# EAGLE board RFM2Pi_v2.6 (EAGLE 6.4)
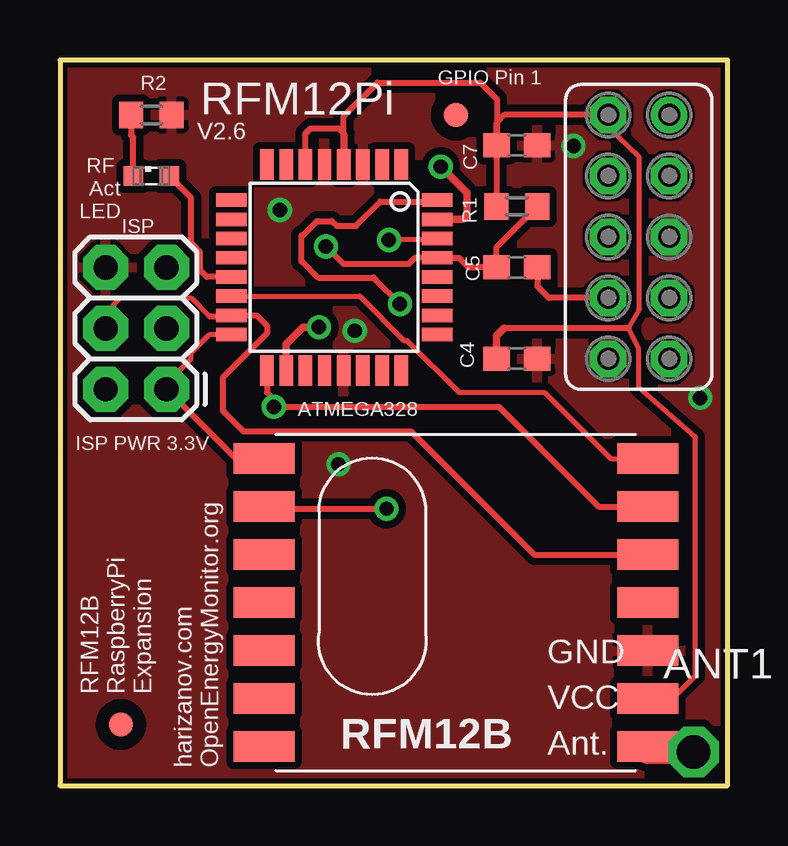
[diagram p0: board, top side]
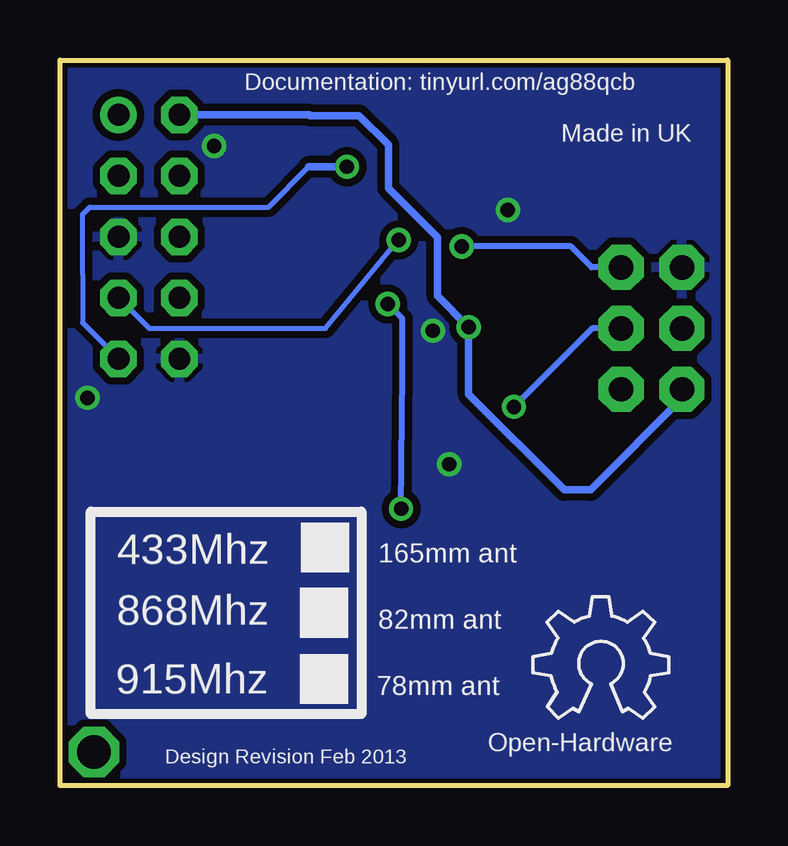
[diagram p1: board, bottom side, seen from below]

Size 27.84 x 30.23 mm. Coordinates in mm from the lower left corner, seen from the top.
Outline: 0,30.23 0,0 27.84,0 27.84,30.23 0,30.23
Copper layers (1*16): Top 0.035mm / dielectric 1.5mm / Bottom 0.035mm
Design rules "default *": minimum track width 8mil, minimum drill 0.6mm, track to track 8mil, track to pad 8mil, pad to pad 8mil, via to via 8mil, smd to smd 5mil, copper to edge 8mil, drill to drill 8mil, minimum pad ring 12mil, minimum via ring 8mil, stop-mask expansion 4mil, vias tented up to drill 0.6mm, thermal gap 8mil
Net classes: 0 default: width 0.254 mm, drill 0.254 mm, clearance 0.254 mm; 1 power: width 0.305 mm, drill 0.305 mm, clearance 0.305 mm

## Footprints (pad centres in the part's own frame; a part is rotated, then mirrored left to right if it is on the bottom)
PAD-01 = drill 1.4 pad 1.778 octagon: 1 0,0
C0603 = smd 1.1 x 1: 1 -0.85,0; 2 0.85,0
2X3 = drill 1.016 pad 1.88 octagon: 1 0,0; 2 0,2.54; 3 2.54,0; 4 2.54,2.54; 5 5.08,0; 6 5.08,2.54
SML0603 = smd 0.8 x 0.8: A 0.75,0; C -0.75,0
R0603 = smd 1 x 1.1: 1 -0.85,0; 2 0.85,0
FE05-2 = drill 0.914: 1 -5.08,1.27 | drill 0.914 octagon: 2 -5.08,-1.27; 3 -2.54,1.27; 4 -2.54,-1.27; 5 0,1.27; 6 0,-1.27; 7 2.54,1.27; 8 2.54,-1.27; 9 5.08,1.27; 10 5.08,-1.27
RFM12B = smd 2.54 x 1.27: ANT 8,-6; FFS -8,2; GND 8,-2; IRQ -8,4; P$8 -8,0; P$9 -8,-2; P$10 -8,-4; P$12 -8,-6; P$16 8,0; SCK 8,4; SDI 8,2; SDO -8,6; SEL 8,6; VDD 8,-4
TQFP32-08 = smd 1.27 x 0.559: 1 -4.293,2.8; 2 -4.293,2; 3 -4.293,1.2; 4 -4.293,0.4; 5 -4.293,-0.4; 6 -4.293,-1.2; 7 -4.293,-2; 8 -4.293,-2.8; 17 4.293,-2.8; 18 4.293,-2; 19 4.293,-1.2; 20 4.293,-0.4; 21 4.293,0.4; 22 4.293,1.2; 23 4.293,2; 24 4.293,2.8 | smd 0.559 x 1.27: 9 -2.8,-4.293; 10 -2,-4.293; 11 -1.2,-4.293; 12 -0.4,-4.293; 13 0.4,-4.293; 14 1.2,-4.293; 15 2,-4.293; 16 2.8,-4.293; 25 2.8,4.293; 26 2,4.293; 27 1.2,4.293; 28 0.4,4.293; 29 -0.4,4.293; 30 -1.2,4.293; 31 -2,4.293; 32 -2.8,4.293
FIDUCIAL_1MM = smd 1 x 1: 1 0,0

## Placement (x,y rotation side)
ANT1  [PAD-01]  26.42,1.4 0 top
C4  0.1uF  [C0603]  19.05,17.78 0 top
C5  0.1uF  [C0603]  19.05,21.59 180 top
C7  0.1uF  [C0603]  19.05,26.67 0 top
ISP  AVR_SPI_PRG_6PTH  [2X3]  4.45,16.51 90 top
LED  [SML0603]  3.81,25.4 0 top
R1  10K  [R0603]  19.05,24.13 180 top
R2  220R  [R0603]  3.81,27.94 180 top
RASPBERRY_PI  [FE05-2]  24.13,22.86 270 top
RFM12B  RFM12B  [RFM12B]  16.51,7.62 0 top
U2  ATMEGA168  [TQFP32-08]  11.43,21.59 270 top
U$1  FIDUCIAL  [FIDUCIAL_1MM]  16.51,27.94 0 top
U$2  FIDUCIAL  [FIDUCIAL_1MM]  2.54,2.54 0 top
U$4  [OSHW_6X200_NOTEXT]  8.13,2.79 0 bottom

## Library data of the parts
ANT1 = discrete
C4 C5 = rcl
C7 = resistor
ISP U2 = SparkFun
LED = led
R1 R2 U$1 U$2 = adafruit
RASPBERRY_PI = con-lsta; OC_FARNELL: unknown; OC_NEWARK: unknown
RFM12B = JeeLabs
U$4 = OSHW

## Nets
+3V3 [power]: C4.1 C7.1 ISP.2 R1.2 RASPBERRY_PI.2 RFM12B.VDD U2.4 U2.6 U2.18
_RESET: C5.1 RASPBERRY_PI.8
A0: U2.23
A1: U2.24
A2: U2.25
A3: U2.26
A4/SDA: U2.27
A5/SCL: U2.28
A6: U2.19
A7: U2.22
D0/RX: RASPBERRY_PI.7 U2.30
D1/TX: RASPBERRY_PI.9 U2.31
D2: RFM12B.IRQ U2.32
D3: U2.1
D4: U2.2
D5: U2.9
D6: U2.10
D7: U2.11
D8: U2.12
D9: LED.A U2.13
D10: RFM12B.SEL U2.14
D11/MOSI: ISP.4 RFM12B.SDI U2.15
D12/MISO: ISP.1 RFM12B.SDO U2.16
D13/SCK: ISP.3 RFM12B.SCK U2.17
GND [power]: C4.2 C7.2 ISP.6 R2.1 RASPBERRY_PI.5 RASPBERRY_PI.10 RFM12B.GND U2.3 U2.5 U2.21
N$3: LED.C R2.2
N$6 [power]: ANT1.1 RFM12B.ANT
RESET: C5.2 ISP.5 R1.1 U2.29

## Tracks (layer width: path | path; a pad name or v marks a point on that pad's centre or on a via)
+3V3  (via drill 0.6 pad 1.01)
  Top 0.203: RASPBERRY_PI.2 22.86,27.43 24.13,26.21 24.13,19.8 23.71,19.05 24.13,18.19 24.13,16.57 26.49,14.51 26.49,4.57 25.54,3.62 RFM12B.VDD
  Top 0.254: 23.71,19.05 18.51,19.05 | RASPBERRY_PI.2 18.54,27.94 18.2,27.6 C7.1 | C7.1 R1.2 | U2.6 10.23,27.17 10.44,27.38 11.61,27.38 11.86,27.13 11.86,25.91 U2.4 11.83,27.88 13.23,29.29 17.53,29.29 18.21,28.6 18.21,26.68 C7.1
  Top 0.305: 18.51,19.05 18.2,18.74 C4.1 | U2.18 9.43,18.39 10.14,19.1 v10.8,19.1
  Bottom 0.254: 17.41,27.91 17.43,27.94 | ISP.2 1.9,16.13
  Bottom 0.305: 17.43,27.94 RASPBERRY_PI.2 | 17.41,27.91 15.37,27.91 14.15,26.7 14.15,24.89 12.1,22.84 12.1,20.4 v10.8,19.1 10.8,16.3 6.81,12.32 5.71,12.32 1.9,16.13
_RESET
  Top 0.254: C5.1 19.9,20.81 20.39,20.32 RASPBERRY_PI.8
D0/RX  (via drill 0.6)
  Top 0.203: U2.30 15.67,22.73 v13.72,22.73
  Bottom 0.203: RASPBERRY_PI.7 24.13,19.05 16.76,19.05 v13.72,22.73
D1/TX  (via drill 0.6)
  Top 0.305: U2.31 16.81,23.59 16.97,23.75 16.97,24.69 v15.88,25.78
  Bottom 0.203: RASPBERRY_PI.9 26.9,19.28 26.9,21.31 26.9,23.8 26.59,24.11 19.15,24.11 17.48,25.78
  Bottom 0.305: v15.88,25.78 17.48,25.78
D2  (via drill 0.6)
  Top 0.254: v14.17,20.07 13.16,21.08 13.08,21.16 10.77,21.16 10.08,21.84 10.06,21.84 10.06,22.91 10.11,22.91 10.72,23.52 11.33,23.52 11.53,23.32 12.34,23.32 13.36,24.33 15.6,24.33 U2.32 | v13.61,11.53 7.87,11.53 8.48,11.53 RFM12B.IRQ
  Bottom 0.254: v14.17,20.07 13.56,19.46 13.56,17.22 v13.61,11.53
D9
  Top 0.254: U2.13 6.12,21.19 5.84,21.46 5.84,22.23 5.46,22.61 5.46,24.5 LED.A
D10
  Top 0.203: U2.14 12.5,20.39 14.35,18.54 14.48,18.54 16.64,16.38 20.2,16.38 22.96,13.62 RFM12B.SEL
D11/MOSI
  Top 0.203: 1.9,19.68 2.54,20.32 5.46,20.32 6.22,19.56
  Top 0.254: RFM12B.SDI 19.78,9.62 14.64,14.76 7.64,14.76 6.78,15.62 6.78,16.99 8.64,18.85 8.64,19.15 8.2,19.59 U2.15 7.11,19.56 6.22,19.56 | ISP.4 1.9,19.68
D12/MISO
  Top 0.203: U2.16 6.22,18.79 5.46,18.03 5.46,17.78 4.45,16.76 ISP.1
  Top 0.254: ISP.1 6.96,13.99 7.75,13.21 8.1,13.21 RFM12B.SDO
D13/SCK  (via drill 0.6 pad 1.01)
  Top 0.254: RFM12B.SCK 22.47,11.62 18.31,15.78 v8.91,15.78 8.91,16.1 8.63,16.38 U2.17
  Bottom 0.254: ISP.3 5.66,19.05 5.66,19.03 v8.91,15.78
GND  (via drill 0.6 pad 1.01)
  other vias: 9.17,23.98 12.29,18.95 21.41,26.64 11.61,13.39 26.7,16.15
  pour Top (isolate 0): -1.14,31.75 -1.4,31.75 -1.4,-1.52 29.34,-1.52 29.34,31.62 -1.27,31.62
  pour Bottom (isolate 0): -0.51,31.5 28.83,31.5 28.83,-0.64 -0.51,-0.64
N$3
  Top 0.254: R2.2 2.96,27.11 3.06,27.01 LED.C
N$6
  Top 0.305: RFM12B.ANT 24.78,1.35 24.78,1.27
  Top 1.016: ANT1.1 24.51,1.4 RFM12B.ANT
RESET  (via drill 0.6 pad 1.01)
  Top 0.254: v11.09,22.46 11.83,21.72 14.54,21.72 14.81,21.99 U2.29 16.64,21.99 17.04,21.59 17.37,21.59 C5.2 18.2,22.43 R1.1
  Bottom 0.254: v11.09,22.46 6.53,22.46 5.66,21.59 ISP.5

## Text on the board
_tsilk: GPIO Pin 1 | RFM12Pi | V2.6 | RF / Act / LED | ATMEGA328 | ISP PWR 3.3V | RFM12B / RaspberryPi / Expansion | harizanov.com / OpenEnergyMonitor.org
_bsilk: Documentation: tinyurl.com/ag88qcb | Made in UK | 165mm ant | 433Mhz | 82mm ant | 868Mhz | 78mm ant | 915Mhz | Open-Hardware | Design Revision Feb 2013